# Altium PCB PCB1_DCDC_Controller.PcbDoc
Units mm, origin at the board's own origin, x right, y up, seen from the top; angles counter-clockwise.
Board outline 39.55 x 41.67 mm, 4 copper layers (Top Layer, Layer 1, Layer 2, Bottom Layer), stack 0.603 mm thick; 36 components, 15 nets, 92 pads, 187 vias.
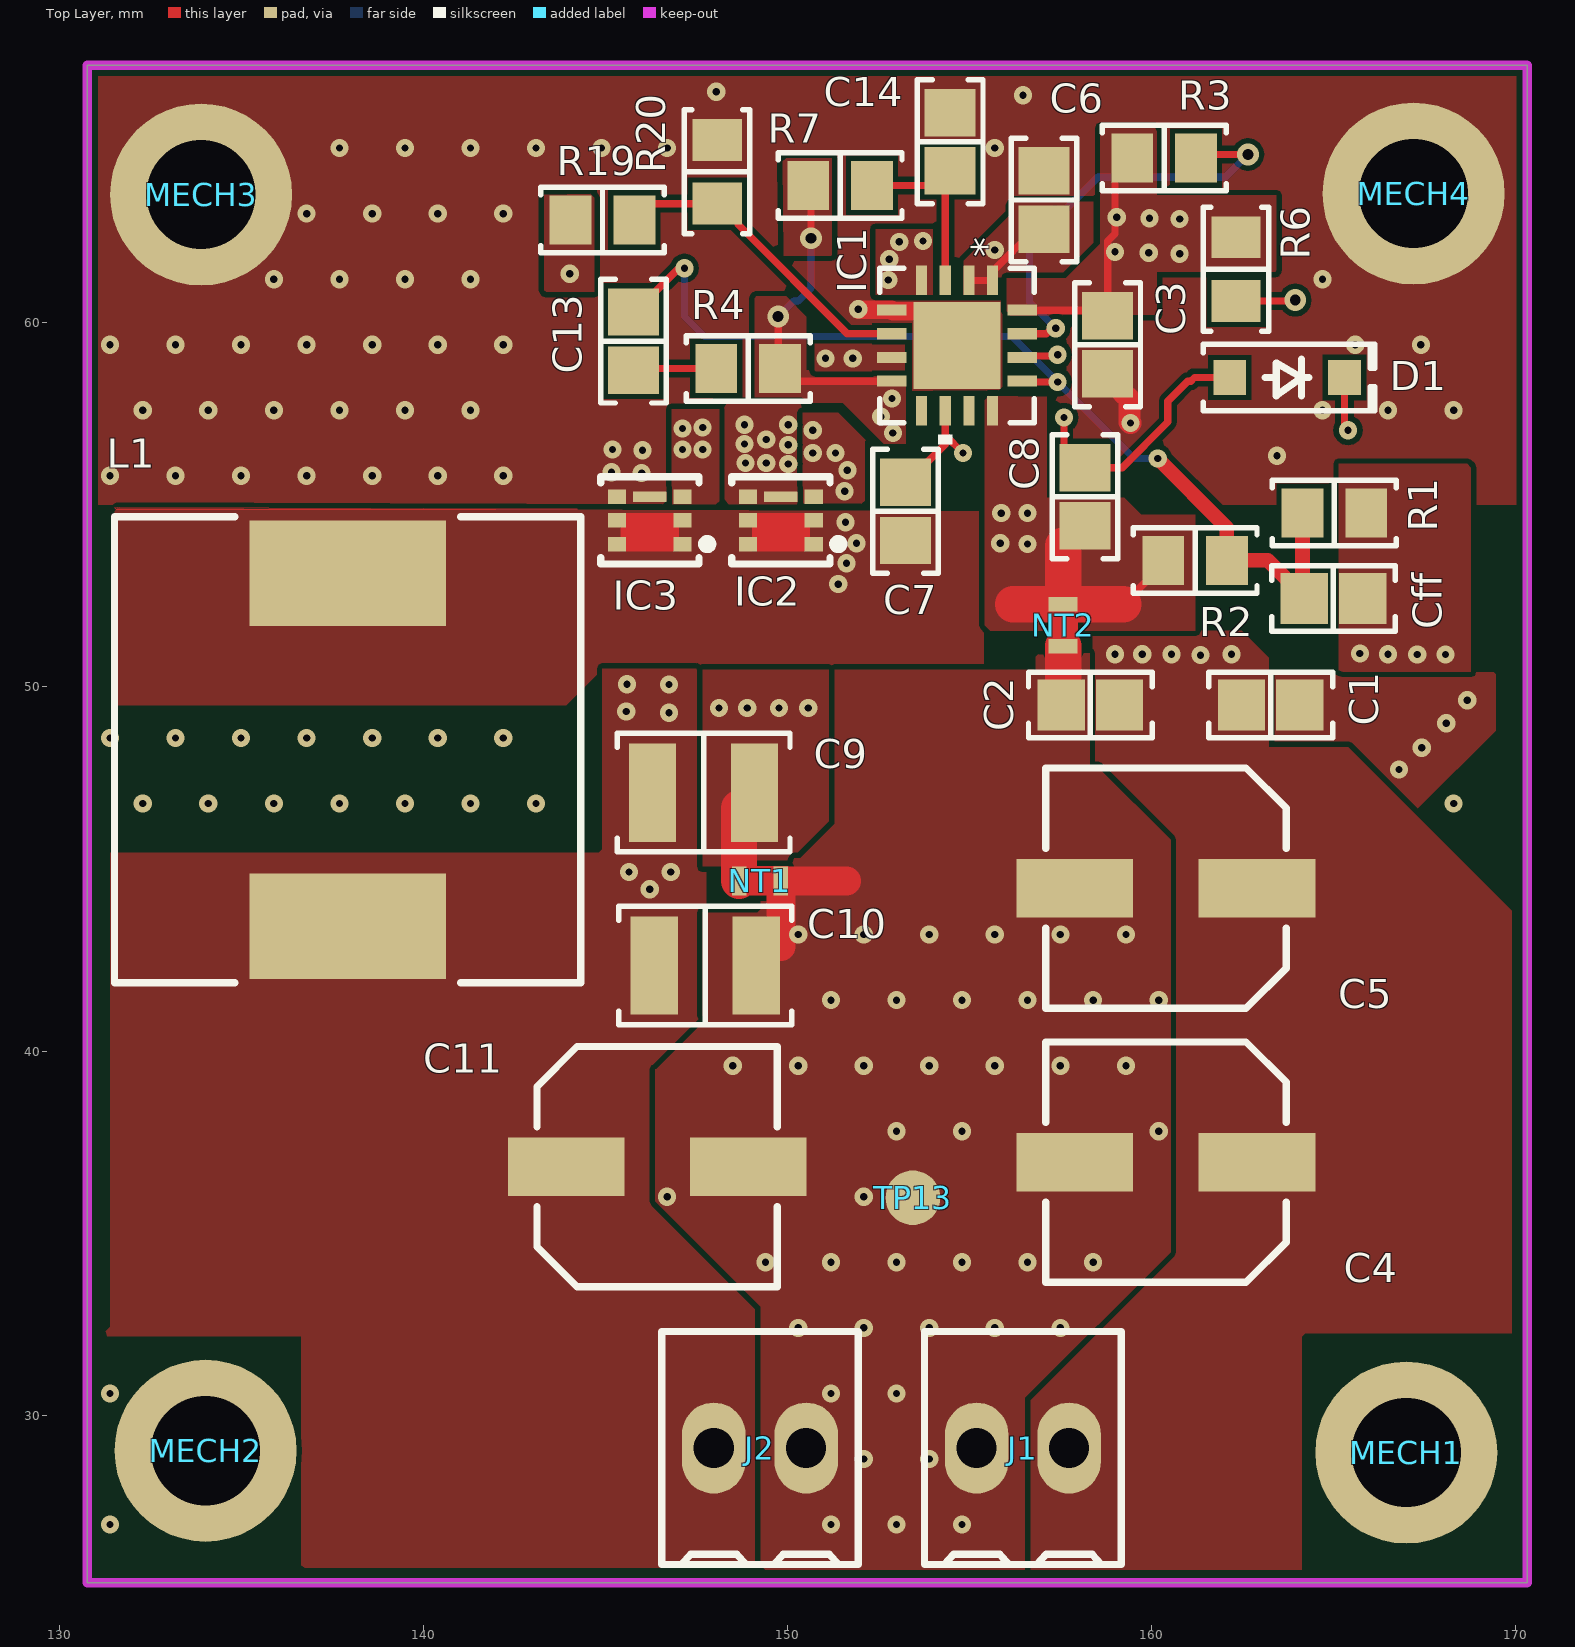
[diagram p0: Top Layer view]
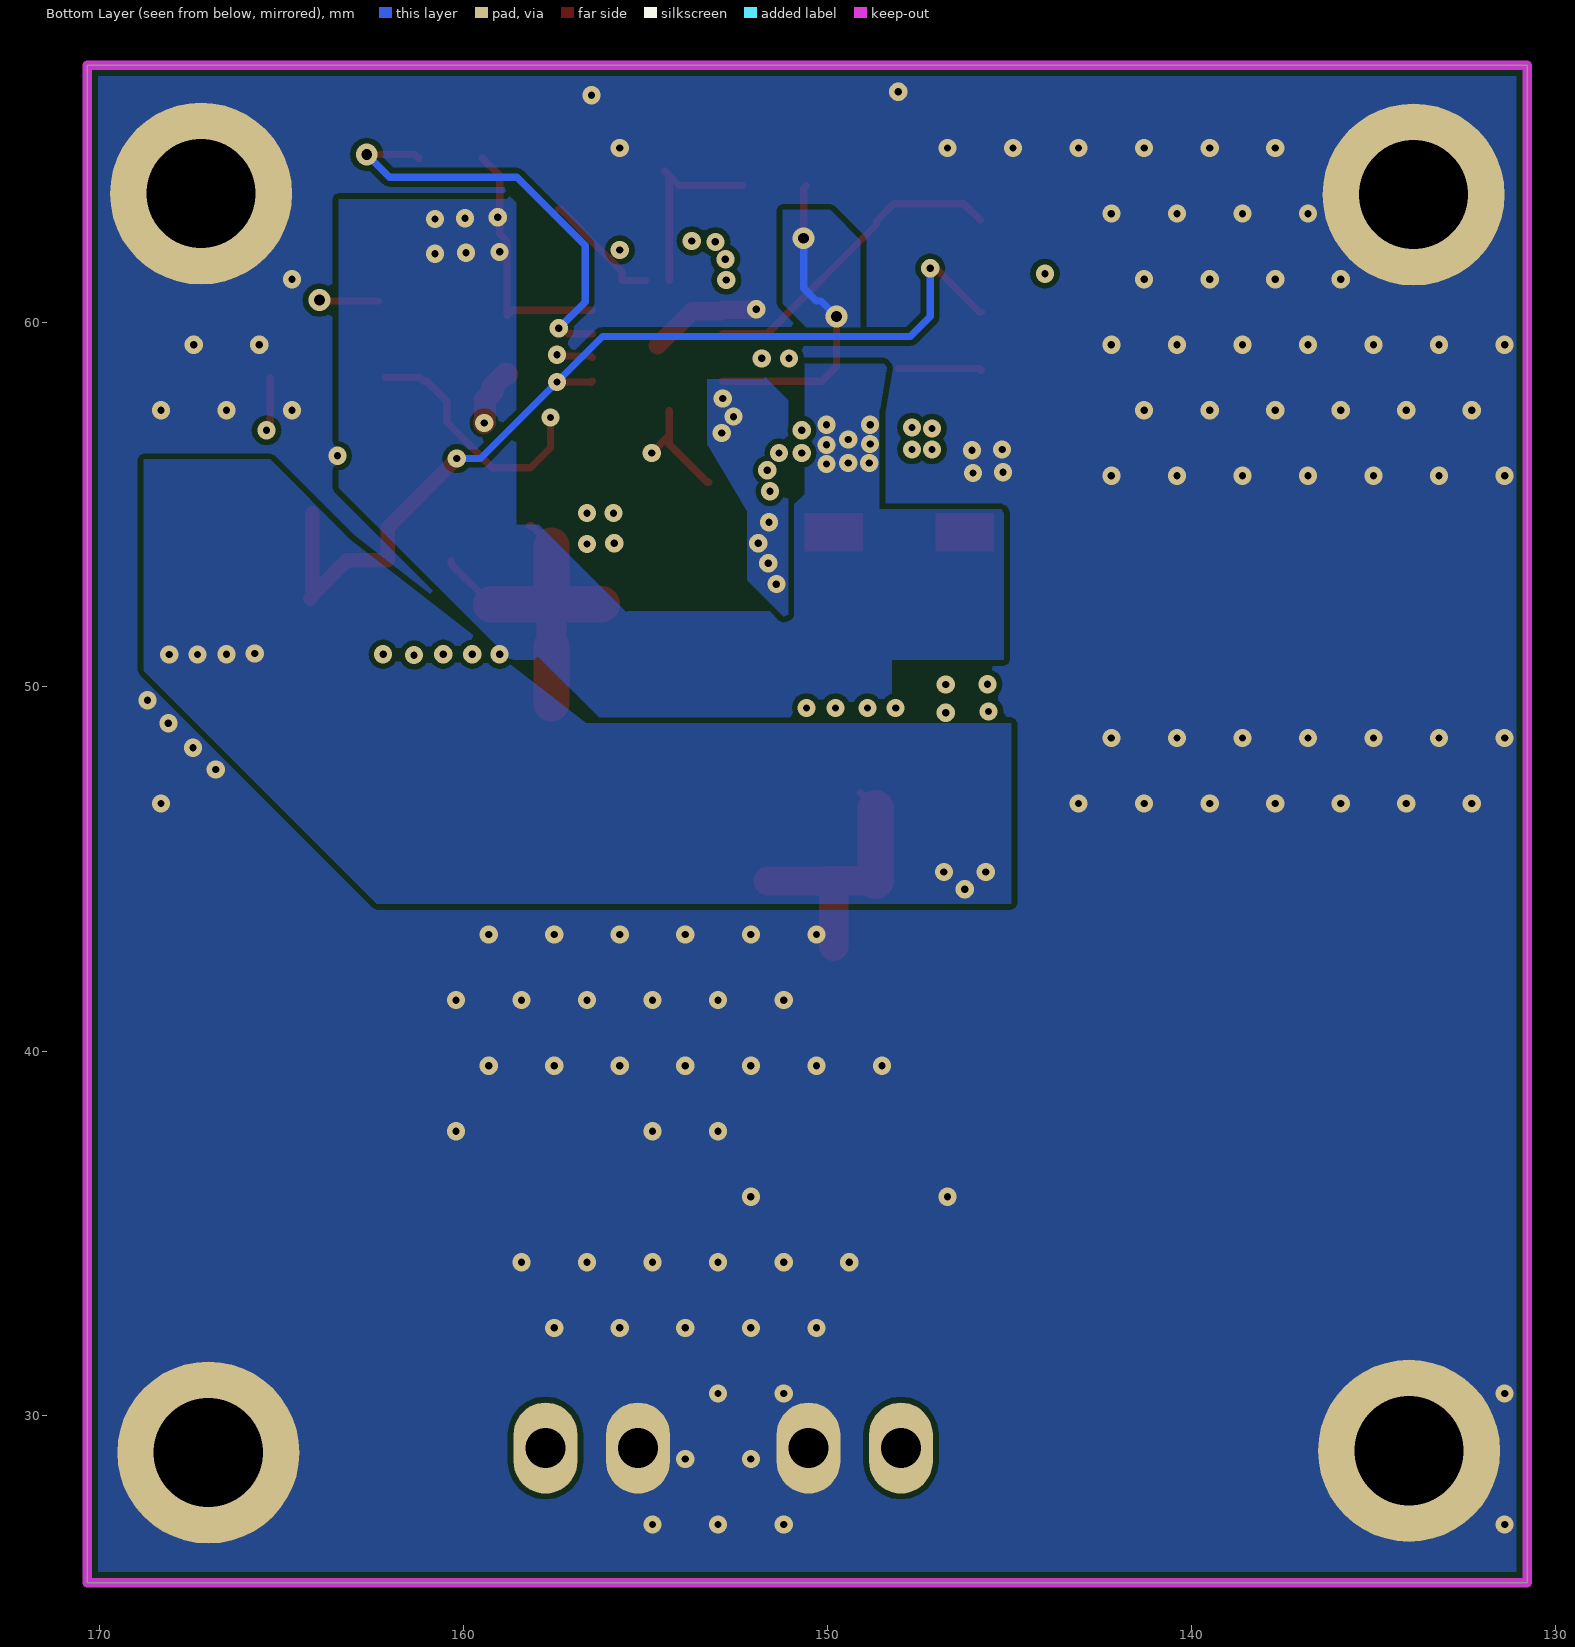
[diagram p1: Bottom Layer view, seen from below]
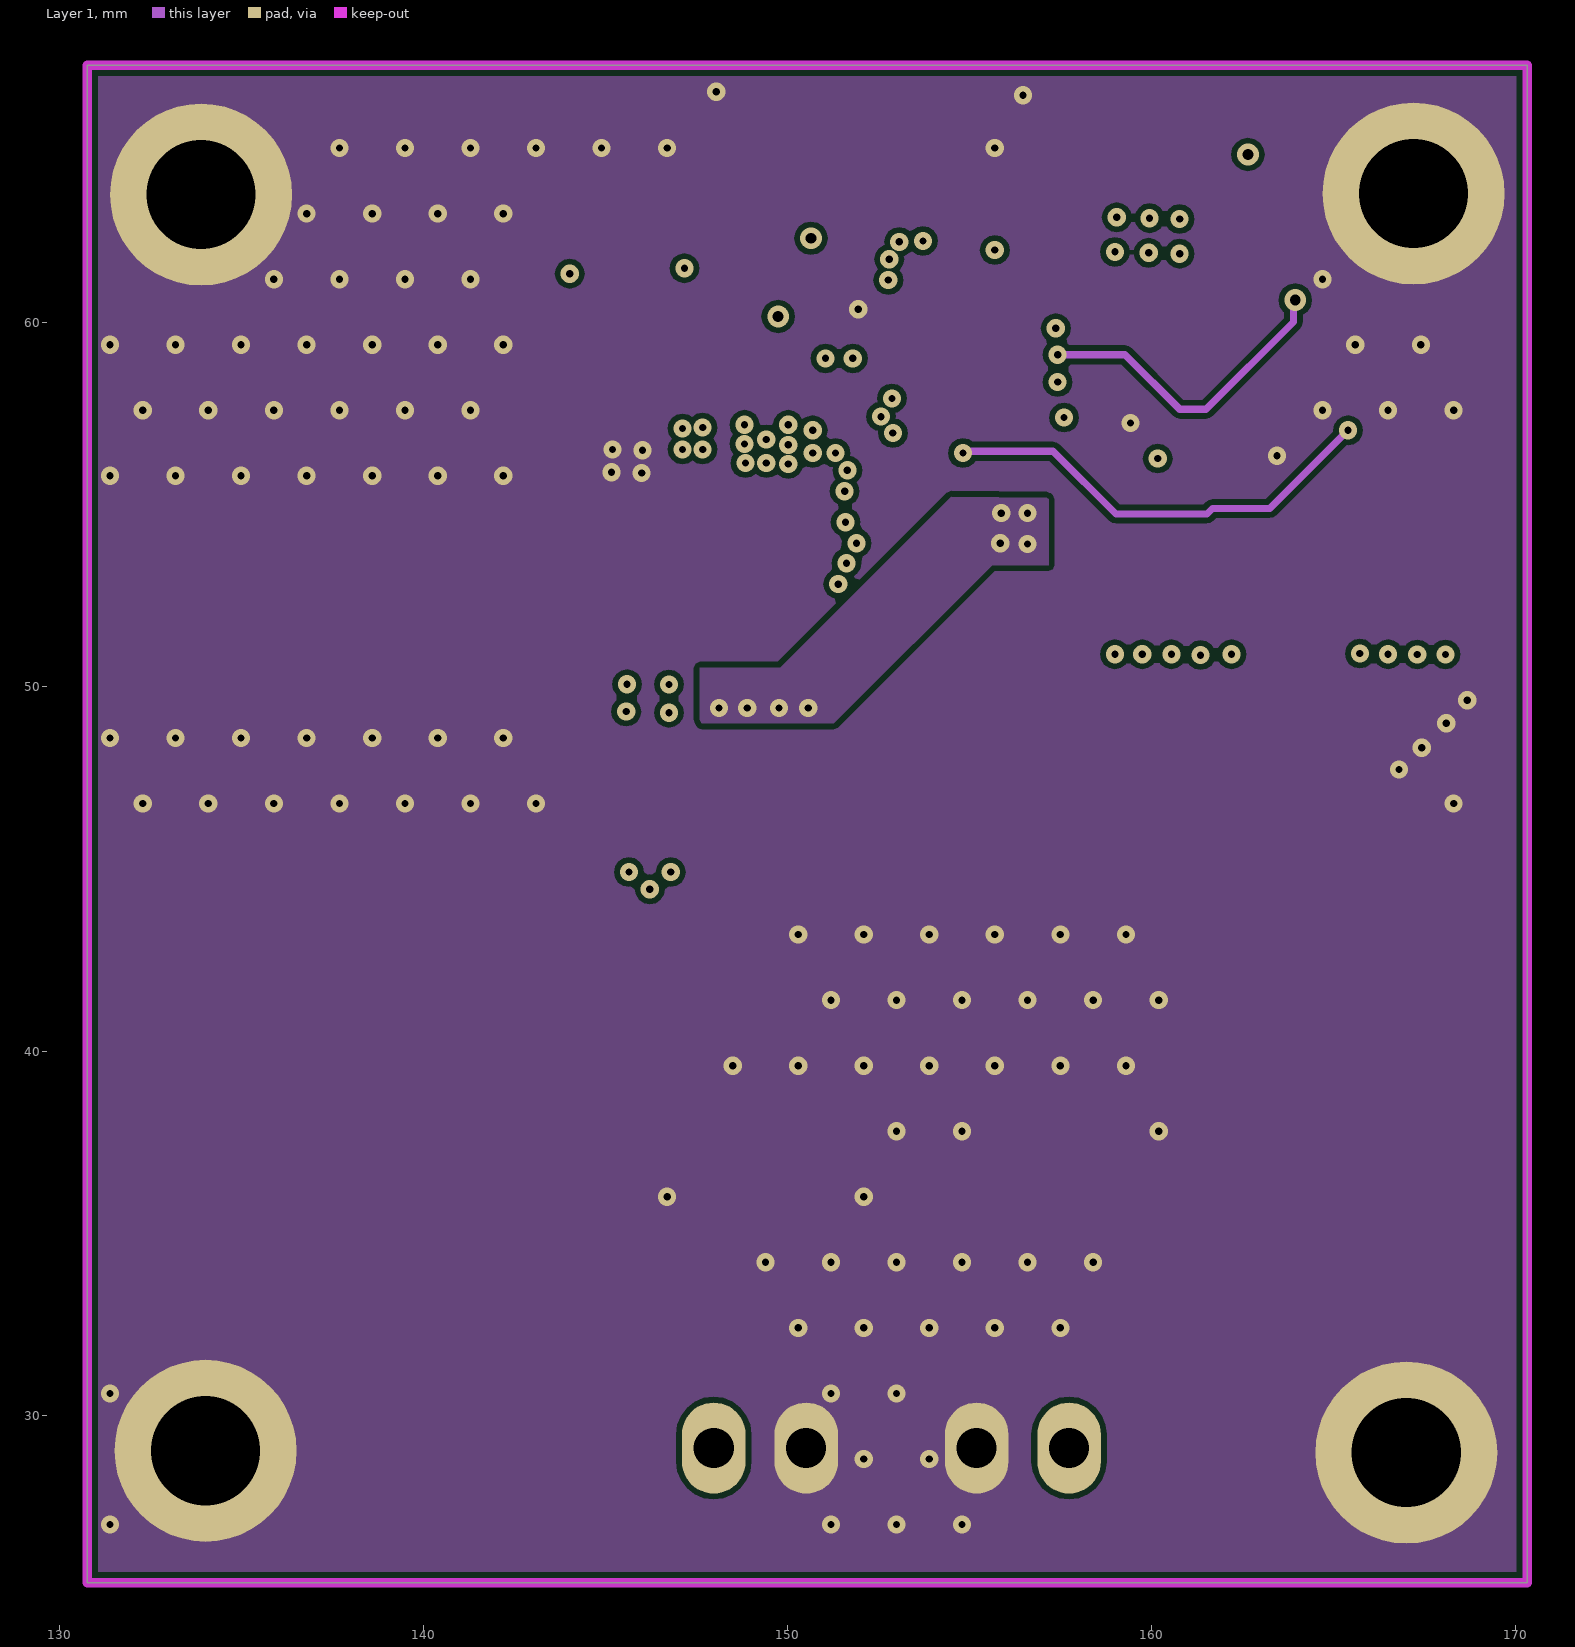
[diagram p2: Layer 1]
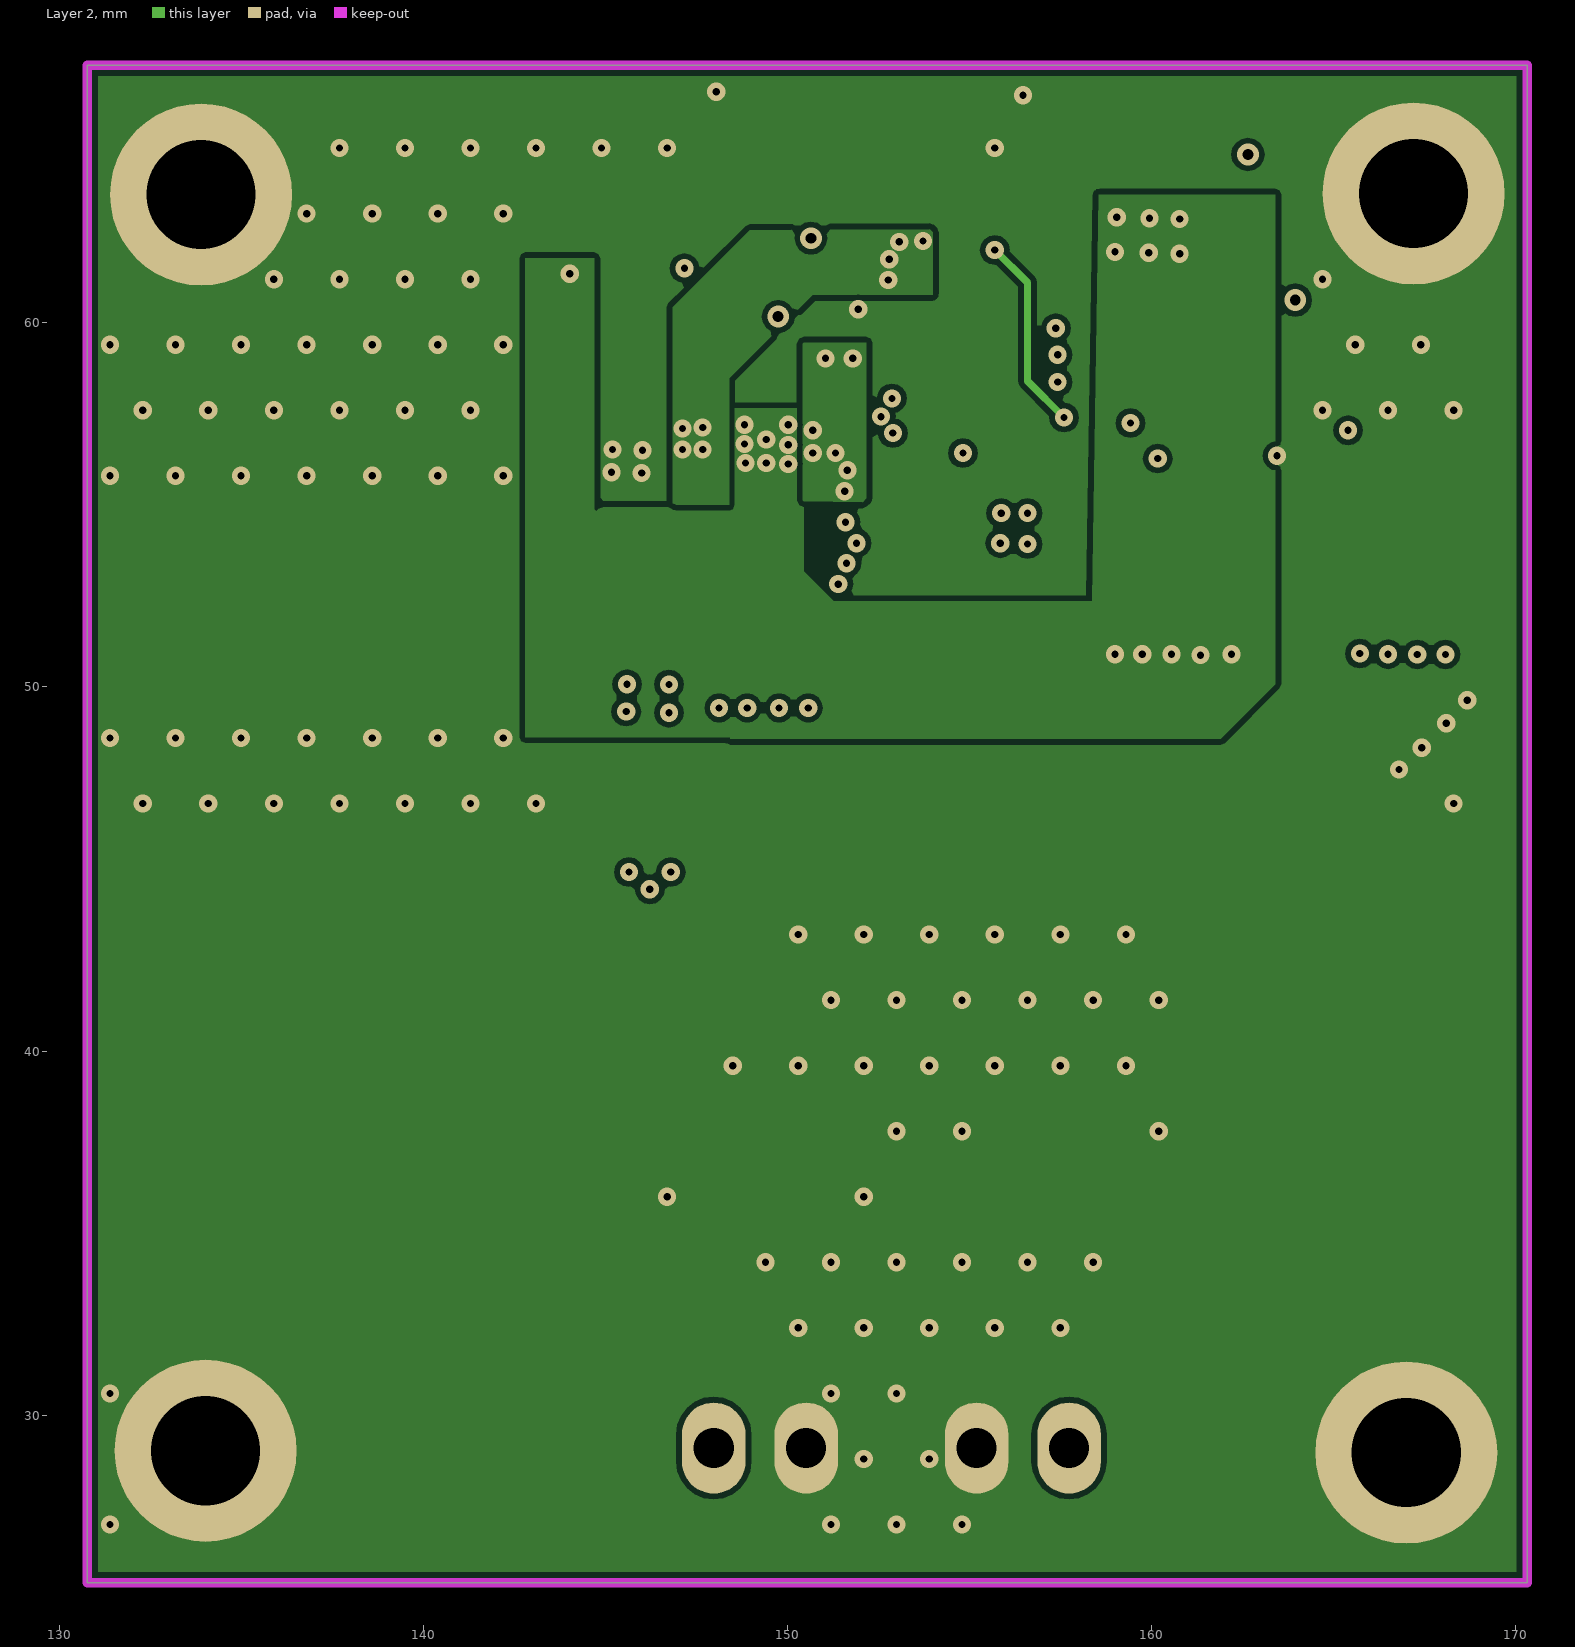
[diagram p3: Layer 2]
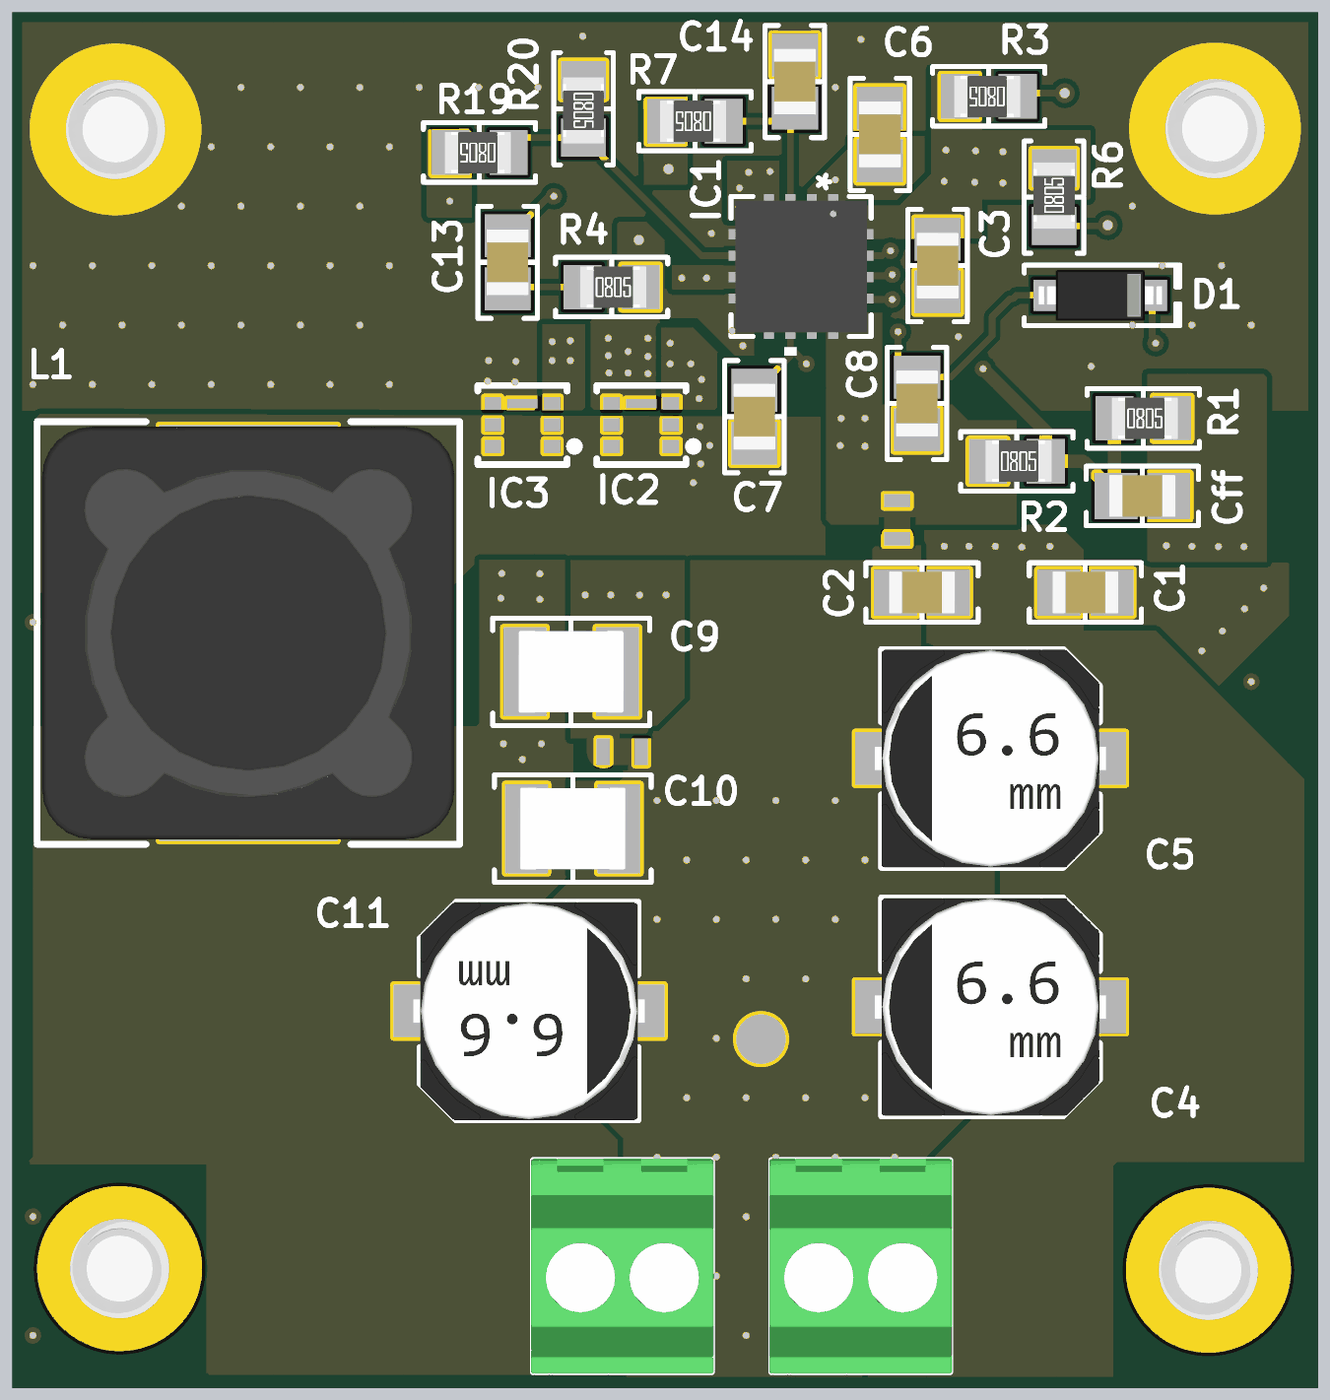
[diagram p4: 3D render of the assembled board from above, using the file's embedded part models]

## Layer stack, top to bottom
Top Solder: solder mask 0.0102, Solder Resist, Dk 3.5
Top Layer: signal copper 0.0356
Dielectric 2: prepreg 0.0711, PP-006, Dk 4.1
Layer 1: signal copper 0.035
Dielectric 1: dielectric 0.32, FR-4, Dk 4.8
Layer 2: signal copper 0.035
Dielectric 3: prepreg 0.0711, PP-006, Dk 4.1
Bottom Layer: signal copper 0.0356
Bottom Solder: solder mask 0.0102, Solder Resist, Dk 3.5

## Board outline
130.775,25.4 130.775,67.075 170.325,67.075 170.325,25.4

## Design rules (kind name [scope] priority, off if disabled: settings)
BoardOutlineClearance [All] p1: gap=0.3 ignorepadtopadclearanceinfootprint=FALSE
Clearance [All] p1: gap=0.15 ignorepadtopadclearanceinfootprint=FALSE
HoleSize [All] p1: absolutevalues=TRUE maxlimit=6.3 minlimit=0.2 maxpercent=80.000 minpercent=20.000
PlaneConnect [All] p1: planeconnectstyle=Direct reliefexpansion=0.508 reliefentries=4 reliefconductorwidth=0.254 reliefairgap=0.254
PolygonConnect [All] p1: connectstyle=Direct reliefconductorwidth=0.254 reliefentries=4 polygonreliefangle="90 Angle" airgapwidth=0.254
RoutingVias [All] p1: holewidth=0.6 width=1.2 viastyle="Through Hole" minholewidth=0.2 minwidth=0.5 maxholewidth=0.3 maxwidth=0.6
SilkToSilkClearance [All] p1: silktosilkclearance=0.16
SolderMaskExpansion "Via Tent" [IsVia] p1: expansion=0.102 istentingtop=TRUE
SolderMaskExpansion [All] p2: expansion=0.102 istentingtop=FALSE
Width [All] p1: maxlimit=1 minlimit=0.127 preferedwidth=0.2
27 further rules are at their usual default settings.

## Classes and differential pairs
component class SCH1_Main: C1 C2 C3 C4 C5 C6 C7 C8 C9 C10 C11 C13 C14 Cff D1 IC1 IC2 IC3 J1 J2 L1 MECH1 MECH2 MECH3 MECH4 NT1 NT2 R3 R4 R6 R7 R19 R20 TP13

## Components (designator, comment, footprint, x,y, rotation, side; value= is the part's Value field where it differs from the comment)
C1 "2.2µF" "CAP 0805_2012" 163.275,49.5 r180 top
C2 "2.2µF" "CAP 0805_2012" 158.325,49.5 r0 top
C3 "2.2µF" "CAP 0805_2012" 158.8,59.4 r90 top
C4 "68µF" "CAP ALSMD 6.6MM H6.1MM" 160.4,36.95 r180 top
C5 "68µF" "CAP ALSMD 6.6MM H6.1MM" 160.4,44.475 r180 top
C6 "1µF" "CAP 0805_2012" 157.05,63.375 r270 top
C7 "0.1µF" "CAP 0805_2012" 153.25,54.825 r90 top
C8 "1µF" "CAP 0805_2012" 158.175,55.225 r90 top
C9 "47µF" "CAP 1210_3225 - 2.8MM" 147.7,47.1 r180 top
C10 "47µF" "CAP 1210_3225 - 2.8MM" 147.75,42.35 r180 top
C11 "470µF" "CAP ALSMD 6.6MM H8.0MM" 146.425,36.825 r0 top
C13 "0.1µF" "CAP 0805_2012" 145.775,59.5 r270 top
C14 "10pF" "CAP 0805_2012" 154.475,64.975 r270 top
Cff "1000pF" "CAP 0805_2012" 165,52.425 r0 top
D1 "BAT46W-TP" SOD-123 163.725,58.5 r0 top
IC1 "MIC2103YML-TR" MLF-16_ML_4X4_00 154.664,59.375 r270 top
IC2 "DMN2011UFDE-7" "DIODES U-DFN2020-6E" 149.825,54.575 r180 top
IC3 "DMN2011UFDE-7" "DIODES U-DFN2020-6E" 146.225,54.575 r180 top
J1 "282834-2" "TE 282834-2" 156.47,29.1 r180 top
J2 "282834-2" "TE 282834-2" 149.25,29.1 r180 top
L1 "6.8µH" "BOURNS SRR1280" 137.925,48.275 r270 top
MECH1 "# pcs." PCB_standoff 167,28.975 r0 top
MECH2 "# pcs." PCB_standoff 134.025,29.025 r0 top
MECH3 "# pcs." PCB_standoff 133.9,63.525 r0 top
MECH4 "# pcs." PCB_standoff 167.2,63.55 r0 top
NT1 "NetTie" NetTie_Narrow2 149.25,44.675 r0 top net-tie
NT2 "NetTie" NetTie_Narrow2 157.575,51.7 r270 top net-tie
R1 "10 kOhms" "RES 0805_2012" 165.025,54.775 r0 top
R2 "1.91 kOhms" "RES 0805_2012" 161.2,53.475 r0 top
R3 "49.9 kOhms" "RES 0805_2012" 160.35,64.525 r180 top
R4 "95.3 Ohms" "RES 0805_2012" 148.925,58.75 r0 top
R6 "100 kOhms" "RES 0805_2012" 162.325,61.475 r90 top
R7 "1 kOhms" "RES 0805_2012" 151.45,63.775 r180 top
R19 "174 kOhms" "RES 0805_2012" 144.925,62.825 r180 top
R20 "100 kOhms" "RES 0805_2012" 148.075,64.15 r270 top
TP13 "Test Point" TestPoint-1.5mm 153.45,35.975 r90 top

## Footprints (in the part's own frame and the unit in brackets; to place one, negate y for a bottom-side part, rotate by r counter-clockwise, add the part's x,y. Pads: shape width x height; smd on the part's side, far side on the other; paste and mask are expansions set on the pad)
"BOURNS SRR1280" [mm] "Precision Wire Wound Inductor, 2-Leads, Body 12.50x12.50mm, IPC Medium Density"
  rect 2.9x5.4 smd: 1(-4.85,0) 2(4.85,0)
  silkscreen extent -6.4,-6.4 6.4,6.4, body extent -6.25,-6.25 6.25,6.25, height 7.9
"CAP 0805_2012" [mm] "Chip Capacitor, 2-Leads, Body 2.00x1.20mm, IPC Medium Density"
  rect 1.3x1.4 smd: 1(-0.8,0) 2(0.8,0)
  silkscreen extent -1.7,-0.9 1.7,0.9, body extent -1,-0.64 1,0.64, height 1.26
"CAP 1210_3225 - 2.8MM" [mm] "Chip Capacitor, 2-Leads, Body 3.20x2.50mm, IPC Medium Density"
  rect 1.3x2.7 smd: 1(-1.4,0) 2(1.4,0)
  silkscreen extent -2.37,-1.63 2.37,1.63, body extent -1.6,-1.25 1.6,1.25, height 2.8
"CAP ALSMD 6.6MM H6.1MM" [mm] "Aluminum Electrolytic Capacitor, Body 6.60x6.60x6.10mm, IPC Low Density"
  rect 3.2x1.6 smd: 1(-2.5,0) 2(2.5,0)
  silkscreen extent -3.3,-3.3 3.3,3.3, body extent -3.5,-3.3 3.5,3.3, height 6.1
"CAP ALSMD 6.6MM H8.0MM" [mm] "Aluminum Electrolytic Capacitor, Body 6.60x6.60x8.0mm, IPC Low Density"
  rect 3.2x1.6 smd: 1(-2.5,0) 2(2.5,0)
  silkscreen extent -3.3,-3.3 3.3,3.3, body extent -3.5,-3.3 3.5,3.3, height 8
"DIODES U-DFN2020-6E" [mm] "U-DFN2020-6(E), 6-Leads, Body 2.00x2.00mm, Pitch 0.65mm, Thermal Pad 1.05x2.3mm, IPC High Density"
  rect 0.5x0.4 smd: D(-0.9,0) D(-0.9,0.65) D(0.9,0) D(0.9,0.65) G(-0.9,-0.65) S(0.9,-0.65)
  rect 0.92x0.285 smd: S(0,-0.65)
  Top Layer region: -0.8,-0.2 0.8,-0.2 0.8,0.85 -0.8,0.85
  silkscreen extent -1.7,-1.2 1.35,1.2, body extent -1,-1 1,1, height 0.63
MLF-16_ML_4X4_00 [mm]
  rect 0.81x0.306 smd paste+0 mask+0: 1(-1.789,0.975) 2(-1.789,0.325) 3(-1.789,-0.325) 4(-1.789,-0.975) 9(1.789,-0.975) 10(1.789,-0.325) 11(1.789,0.325) 12(1.789,0.975)
  rect 0.306x0.81 smd paste+0 mask+0: 5(-0.975,-1.789) 6(-0.325,-1.789) 7(0.325,-1.789) 8(0.975,-1.789) 13(0.975,1.789) 14(0.325,1.789) 15(-0.325,1.789) 16(-0.975,1.789)
  rect 2.388x2.388 smd paste+0 mask+0: 17(0,0)
  silkscreen extent -2.12,-2.12 2.7,2.12, body extent -1.99,-1.99 1.99,1.99, height 0.89
NetTie_Narrow2 [mm]
  rect 0.4x0.8 smd: 1(-0.575,0) 2(0.575,0)
  Top Layer region: -0.775,0.4 -0.775,-0.4 0.775,-0.4 0.775,0.4
PCB_standoff [mm]
  round 5 hole 3 unplated: MH1(0,0)
  body extent -2.5,-2.89 2.5,2.89, height 5
"RES 0805_2012" [mm] "Chip Resistor, 2-Leads, Body 2.00x1.25mm, IPC Medium Density"
  rect 1.15x1.35 smd: 1(-0.875,0) 2(0.875,0)
  silkscreen extent -1.7,-0.9 1.7,0.9, body extent -0.95,-0.62 1.05,0.63, height 0.6
SOD-123 [mm] "SOD, 2-Leads, Body 1.55x3.70mm, IPC Medium Density"
  rect 0.9x0.95 smd: 1(-1.575,0) 2(1.575,0)
  silkscreen extent -2.3,-0.92 2.41,0.92, body extent -1.86,-0.78 1.86,0.77, height 1.35
"TE 282834-2" [mm]
  oval 1.75x2.5 hole 1.1: 1(-1.27,0) 2(1.27,0)
  silkscreen extent -2.7,-3.2 2.7,3.2, body extent -2.77,-3.25 2.77,3.25, height 10
TestPoint-1.5mm [mm]
  round 1.5 smd: 1(0,0)

## Part data
C1 C2 C3: library part 08053C225K4Z2A, "CAP CER 2.2UF 25V X7R 0805", Device Package="0805 (2012 Metric)", Manufacturer="AVX Corporation", Operating Temperature="-55°C ~ 125°C", Ratings=AEC-Q200, Supplier Part Number 1=478-12141-1-ND, Temperature Coefficient=X7R, Tolerance=±10%, Voltage - Rated=25V, Applications="Automotive, Boardflex Sensitive", Capacitance=2.2µF, ComponentLink1Description=Datasheet, ComponentLink1URL=http://datasheets.avx.com/AutoMLCC.pdf, ComponentLink2Description="DigiKey Link", ComponentLink2URL=http://digikey.com/product-detail/en/avx-corporation/08053C225K4Z2A/478-12141-1-ND/9374710, Features="Soft Termination", LastUpdated="1/21/2020 12:02:42 AM", Lifecycle Status=Active, Minimum Order=1, Mounting Type="Surface Mount, MLCC", Package / Case="0805 (2012 Metric)", Packaging=TapeAndReel, Part Number=08053C225K4Z2A, Part Status=Active, PartId=16604, Price=0.08, Series=FLEXITERM®, Size / Dimension="0.079\" L x 0.049\" W (2.01mm x 1.25mm)", Supplier 1=DigiKey
C4 C5: library part UWD1E680MCL1GS, "CAP ALUM 68UF 20% 25V SMD", Device Package="Radial, Can - SMD", Lifetime @ Temp.="2000 Hrs @ 105°C", Manufacturer=Nichicon, Operating Temperature="-55°C ~ 105°C", Ripple Current @ High Frequency="230mA @ 100kHz", Ripple Current @ Low Frequency="115mA @ 120Hz", Supplier Part Number 1=493-9673-1-ND, Tolerance=±20%, Voltage - Rated=25V, Applications="General Purpose", Capacitance=68µF, ComponentLink1Description=Datasheet, ComponentLink1URL=http://nichicon-us.com/english/products/pdfs/e-uwd.pdf, ComponentLink2Description="DigiKey Link", ComponentLink2URL=http://digikey.com/product-detail/en/nichicon/UWD1E680MCL1GS/493-9673-1-ND/3963005, Height - Seated (Max)="0.228\" (5.80mm)", Impedance="440 mOhms", LastUpdated="1/21/2020 2:33:32 AM", Lifecycle Status=Active, Minimum Order=1, Mounting Type="Surface Mount", Package / Case="Radial, Can - SMD", Packaging=TapeAndReel, Part Number=UWD1E680MCL1GS, Part Status=Active, PartId=8861, Price=0.22, Series=UWD, Size / Dimension="0.248\" Dia (6.30mm)", Supplier 1=DigiKey, Surface Mount Land Size="0.260\" L x 0.260\" W (6.60mm x 6.60mm)"
C6 C8: library part CC0805KKX5R8BB105, "CAP CER 1UF 25V X5R 0805", Device Package="0805 (2012 Metric)", Manufacturer=Yageo, Operating Temperature="-55°C ~ 85°C", Supplier Part Number 1=311-1868-1-ND, Temperature Coefficient=X5R, Tolerance=±10%, Voltage - Rated=25V, Applications="General Purpose", Capacitance=1µF, ComponentLink1Description=Datasheet, ComponentLink1URL=https://www.yageo.com/upload/media/product/productsearch/datasheet/mlcc/UPY-GPHC_X5R_4V-to-50V_25.pdf, ComponentLink2Description="DigiKey Link", ComponentLink2URL=http://digikey.com/product-detail/en/yageo/CC0805KKX5R8BB105/311-1868-1-ND/5195770, LastUpdated="1/21/2020 12:03:00 AM", Lifecycle Status=Active, Minimum Order=1, Mounting Type="Surface Mount, MLCC", Package / Case="0805 (2012 Metric)", Packaging=TapeAndReel, Part Number=CC0805KKX5R8BB105, Part Status=Active, PartId=6721, Price=0.04, Series=CC, Size / Dimension="0.079\" L x 0.049\" W (2.00mm x 1.25mm)", Supplier 1=DigiKey, Thickness (Max)="0.057\" (1.45mm)"
C7 C13: library part CL21B104KBFNNNE, "CAP CER 0.1UF 50V X7R 0805", Device Package="0805 (2012 Metric)", Manufacturer="Samsung Electro-Mechanics", Operating Temperature="-55°C ~ 125°C", Supplier Part Number 1=1276-1180-1-ND, Temperature Coefficient=X7R, Tolerance=±10%, Voltage - Rated=50V, Applications="General Purpose", Capacitance=0.1µF, ComponentLink1Description=Datasheet, ComponentLink1URL=http://www.samsungsem.com/kr/support/product-search/mlcc/CL21B104KBFNNNE.jsp, ComponentLink2Description="DigiKey Link", ComponentLink2URL=http://digikey.com/product-detail/en/samsung-electro-mechanics/CL21B104KBFNNNE/1276-1180-1-ND/3889266, LastUpdated="1/21/2020 12:03:00 AM", Lifecycle Status=Active, Minimum Order=1, Mounting Type="Surface Mount, MLCC", Package / Case="0805 (2012 Metric)", Packaging=TapeAndReel, Part Number=CL21B104KBFNNNE, Part Status=Active, PartId=6348, Price=0.01, Series=CL, Size / Dimension="0.079\" L x 0.049\" W (2.00mm x 1.25mm)", Supplier 1=DigiKey, Thickness (Max)="0.053\" (1.35mm)"
C9 C10: library part CL32A476KOJNNNE, "CAP CER 47UF 16V X5R 1210", Device Package="1210 (3225 Metric)", Manufacturer="Samsung Electro-Mechanics", Operating Temperature="-55°C ~ 85°C", Supplier Part Number 1=1276-3376-1-ND, Temperature Coefficient=X5R, Tolerance=±10%, Voltage - Rated=16V, Applications="General Purpose", Capacitance=47µF, ComponentLink1Description=Datasheet, ComponentLink1URL=http://www.samsungsem.com/kr/support/product-search/mlcc/CL32A476KOJNNNE.jsp, ComponentLink2Description="DigiKey Link", ComponentLink2URL=http://digikey.com/product-detail/en/samsung-electro-mechanics/CL32A476KOJNNNE/1276-3376-1-ND/3891462, LastUpdated="1/21/2020 12:30:39 AM", Lifecycle Status=Active, Minimum Order=1, Mounting Type="Surface Mount, MLCC", Package / Case="1210 (3225 Metric)", Packaging=TapeAndReel, Part Number=CL32A476KOJNNNE, Part Status=Active, PartId=23769, Price=0.43, Series=CL, Size / Dimension="0.126\" L x 0.098\" W (3.20mm x 2.50mm)", Supplier 1=DigiKey, Thickness (Max)="0.106\" (2.70mm)"
C11: library part EMZR100ARA471MF80G, "CAP ALUM 470UF 20% 10V SMD", Device Package="Radial, Can - SMD", ESR (Equivalent Series Resistance)="160 mohm @ 100kHz", Lifetime @ Temp.="2000 Hrs @ 105°C", Manufacturer="United Chemi-Con", Operating Temperature="-55°C ~ 105°C", Ratings=AEC-Q200, Ripple Current @ High Frequency="600mA @ 100kHz", Ripple Current @ Low Frequency="300mA @ 120Hz", Supplier Part Number 1=565-5133-1-ND, Tolerance=±20%, Voltage - Rated=10V, Applications=Automotive, Capacitance=470µF, ComponentLink1Description=Datasheet, ComponentLink1URL=http://www.chemi-con.co.jp/cgi-bin/CAT_DB/SEARCH/cat_db_al.cgi?e=e&j=p&pdfname=mzr, ComponentLink2Description="DigiKey Link", ComponentLink2URL=http://digikey.com/product-detail/en/united-chemi-con/EMZR100ARA471MF80G/565-5133-1-ND/8637128, Height - Seated (Max)="0.315\" (8.00mm)", LastUpdated="1/21/2020 4:06:45 AM", Lifecycle Status=Active, Minimum Order=1, Mounting Type="Surface Mount", Package / Case="Radial, Can - SMD", Packaging=TapeAndReel, Part Number=EMZR100ARA471MF80G, Part Status=Active, PartId=8433, Polarization=Polar, Price=0.20, Series="Alchip™- MZR", Size / Dimension="0.248\" Dia (6.30mm)", Supplier 1=DigiKey, Surface Mount Land Size="0.260\" L x 0.260\" W (6.60mm x 6.60mm)"
C14: library part C0805C100J5GACTU, "CAP CER 10PF 50V C0G/NP0 0805", Device Package="0805 (2012 Metric)", Manufacturer=KEMET, Operating Temperature="-55°C ~ 125°C", Supplier Part Number 1=399-1108-1-ND, Temperature Coefficient="C0G, NP0", Tolerance=±5%, Voltage - Rated=50V, Applications="General Purpose", Capacitance=10pF, ComponentLink1Description=Datasheet, ComponentLink1URL=https://api.kemet.com/component-edge/download/datasheet/C0805C100J5GACTU.pdf, ComponentLink2Description="DigiKey Link", ComponentLink2URL=http://digikey.com/product-detail/en/kemet/C0805C100J5GACTU/399-1108-1-ND/411383, Features="Low ESL", LastUpdated="1/21/2020 12:02:51 AM", Lifecycle Status=Active, Minimum Order=1, Mounting Type="Surface Mount, MLCC", Package / Case="0805 (2012 Metric)", Packaging=TapeAndReel, Part Number=C0805C100J5GACTU, Part Status=Active, PartId=12731, Price=0.02, Series="SMD Comm C0G", Size / Dimension="0.079\" L x 0.049\" W (2.00mm x 1.25mm)", Supplier 1=DigiKey, Thickness (Max)="0.035\" (0.88mm)"
Cff: library part CC0805GRNPO9BN102, "CAP CER 1000PF 50V NPO 0805", Device Package="0805 (2012 Metric)", Manufacturer=Yageo, Operating Temperature="-55°C ~ 125°C", Supplier Part Number 1=311-4189-1-ND, Temperature Coefficient="C0G, NP0", Tolerance=±2%, Voltage - Rated=50V, Applications="General Purpose", Capacitance=1000pF, ComponentLink1Description=Datasheet, ComponentLink1URL=https://www.yageo.com/upload/media/product/productsearch/datasheet/mlcc/UPY-GP_NP0_16V-to-50V_17.pdf, ComponentLink2Description="DigiKey Link", ComponentLink2URL=http://digikey.com/product-detail/en/yageo/CC0805GRNPO9BN102/311-4189-1-ND/8025278, LastUpdated="1/21/2020 12:02:57 AM", Lifecycle Status=Active, Minimum Order=1, Mounting Type="Surface Mount, MLCC", Package / Case="0805 (2012 Metric)", Packaging=TapeAndReel, Part Number=CC0805GRNPO9BN102, Part Status=Active, PartId=8594, Price=0.03, Series=CC, Size / Dimension="0.079\" L x 0.049\" W (2.00mm x 1.25mm)", Supplier 1=DigiKey, Thickness (Max)="0.028\" (0.70mm)"
D1: "DIODE SCHOTTKY 100V 75MA SOD123", Capacitance @ Vr, F="10pF @ 0V, 1MHz", Current - Average Rectified (Io)=75mA, Current - Reverse Leakage @ Vr="5µA @ 75V", Device Package=SOD-123, Manufacturer="Micro Commercial Co", Operating Temperature - Junction="-55°C ~ 125°C", Supplier Part Number 1=BAT46W-TPMSCT-ND, Voltage - DC Reverse (Vr) (Max)=100V, Voltage - Forward (Vf) (Max) @ If="450mV @ 10mA", ComponentLink1Description=Datasheet, ComponentLink1URL=https://www.mccsemi.com/pdf/Products/BAT46W(SOD-123).pdf, ComponentLink2Description="DigiKey Link", ComponentLink2URL=http://digikey.com/product-detail/en/micro-commercial-co/BAT46W-TP/BAT46W-TPMSCT-ND/2345686, Diode Type=Schottky, LastUpdated="1/21/2020 2:42:33 AM", Lifecycle Status=Active, Minimum Order=1, Mounting Type="Surface Mount", Package / Case=SOD-123, Packaging=TapeAndReel, Part Number=BAT46W-TP, Part Status=Active, PartId=2322, Price=0.05, Series=-, Speed="Small Signal =< 200mA (Io), Any Speed", Supplier 1=DigiKey, Supplier Device Package=SOD-123
IC1: "IC REG CTRLR BUCK 16MLF", Manufacturer=Microchip, Supplier Part Number 1=576-4156-1-ND, Built_By=EMA_Jessica, Category="Voltage Regulators - Switching", ComponentLink1Description=http://components.arrow.com/part/dataview/56727868S414286N1374?src-supplier=Arrow, ComponentLink1URL=http://components.arrow.com/part/dataview/56727868S414286N1374?src-supplier=Arrow, ComponentLink2Description=http://components.arrow.com/part/dataview/0323_06358916?src-supplier=Arrow+Europe, ComponentLink2URL=http://components.arrow.com/part/dataview/0323_06358916?src-supplier=Arrow+Europe, ComponentLink3Description=http://www.microchip.com/mymicrochip/filehandler.aspx?ddocname=en579526&src-supplier=Digi-Key, ComponentLink3URL=http://www.microchip.com/mymicrochip/filehandler.aspx?ddocname=en579526&src-supplier=Digi-Key, ComponentLink4Description=http://www.micrel.com/_PDF/MIC2103_4.pdf?src-supplier=Mouser, ComponentLink4URL=http://www.micrel.com/_PDF/MIC2103_4.pdf?src-supplier=Mouser, Copyright="Copyright (C) 2018 Accelerated Designs. All rights reserved", Manufacturer Part Number=MIC2103YML-TR, Manufacturer_Part_Number=MIC2103YML-TR, Pricing 1="1=1.38000, 25=1.15000, 100=1.05000 (USD)", RefDes=RefDes, RoHS=Yes, SourceLibrary=Microchip_2019-08-23_2, Stock 1=4575, Supplier 1=Digi-Key, Type=DEV, Vendor=Microchip
IC2 IC3: "MOSFET N-CH 20V 11.7A UDFN2020-6", Current - Continuous Drain (Id) @ 25°C="11.7A (Ta)", Device Package="6-UDFN Exposed Pad", Drain to Source Voltage (Vdss)=20V, Drive Voltage (Max Rds On,  Min Rds On)="1.5V, 4.5V", Input Capacitance (Ciss) (Max) @ Vds="2248pF @ 10V", Manufacturer="Diodes Incorporated", Operating Temperature="-55°C ~ 150°C (TJ)", Power Dissipation (Max)="610mW (Ta)", Supplier Device Package="U-DFN2020-6 (Type E)", Supplier Part Number 1=DMN2011UFDE-7DICT-ND, ComponentLink1Description=Datasheet, ComponentLink1URL=https://www.diodes.com/assets/Datasheets/DMN2011UFDE.pdf, ComponentLink2Description="DigiKey Link", ComponentLink2URL=http://digikey.com/product-detail/en/diodes-incorporated/DMN2011UFDE-7/DMN2011UFDE-7DICT-ND/4810946, FET Type=N-Channel, Gate Charge (Qg) (Max) @ Vgs="56nC @ 10V", LastUpdated="3/30/2020 1:01:59 PM", Lifecycle Status=Active, Minimum Order=1, Mounting Type="Surface Mount", Package / Case="6-UDFN Exposed Pad", Packaging=TapeAndReel, Part Number=DMN2011UFDE-7, Part Status=Active, Price=0.24, Rds On (Max) @ Id, Vgs="9.5mOhm @ 7A, 4.5V", Series=-, Supplier 1=DigiKey, Technology="MOSFET (Metal Oxide)", Vgs (Max)=±12V, Vgs(th) (Max) @ Id="1V @ 250µA"
J1 J2: "TERM BLK 2P SIDE ENT 2.54MM PCB", Color=Green, Current=10A, Manufacturer="TE Connectivity AMP Connectors", Supplier Part Number 1=A98333-ND, Voltage=150V, ComponentLink1Description=Datasheet, ComponentLink1URL=https://www.te.com/commerce/DocumentDelivery/DDEController?Action=srchrtrv&DocNm=282834&DocType=Customer+Drawing&DocLang=English, ComponentLink2Description="DigiKey Link", ComponentLink2URL=http://digikey.com/product-detail/en/te-connectivity-amp-connectors/282834-2/A98333-ND/1150135, LastUpdated="1/15/2020 4:15:38 AM", Lifecycle Status=Active, Mating Orientation="Horizontal with Board", Minimum Order=1, Mounting Type="Through Hole", Number of Levels=1, Packaging=Bulk, Part Number=282834-2, Part Status=Active, Pitch="0.100\" (2.54mm)", Positions Per Level=2, Price=0.88, Series=Buchanan, Supplier 1=DigiKey, Wire Gauge="16-30 AWG", Wire Termination="Screw - Rising Cage Clamp"
L1: library part SRR1280-6R8Y, "FIXED IND 6.8UH 7.6A 18.5MOHM SM", Current - Saturation=8A, Current Rating (Amps)=7.6A, DC Resistance (DCR)="18.5mOhm Max", Device Package=Nonstandard, Frequency - Self Resonant=22MHz, Inductance Frequency - Test=100kHz, Manufacturer="Bourns Inc.", Operating Temperature="-40°C ~ 125°C", Q @ Freq="20 @ 7.96MHz", Supplier Part Number 1=SRR1280-6R8YCT-ND, Tolerance=±30%, ComponentLink1Description=Datasheet, ComponentLink1URL=https://www.bourns.com/docs/Product-Datasheets/SRR1280.pdf, ComponentLink2Description="DigiKey Link", ComponentLink2URL=http://digikey.com/product-detail/en/bourns-inc/SRR1280-6R8Y/SRR1280-6R8YCT-ND/3986771, Height - Seated (Max)="0.315\" (8.00mm)", Inductance=6.8µH, LastUpdated="1/21/2020 3:25:29 AM", Lifecycle Status=Active, Material - Core=Ferrite, Minimum Order=1, Mounting Type="Surface Mount", Package / Case=Nonstandard, Packaging=TapeAndReel, Part Number=SRR1280-6R8Y, Part Status=Active, PartId=41, Price=0.65, Series=SRR1280, Shielding=Shielded, Size / Dimension="0.492\" L x 0.492\" W (12.50mm x 12.50mm)", Supplier 1=DigiKey, Type=Wirewound
MECH1 MECH2 MECH3 MECH4: library part "STANDOFF_M-F_THREADED_M3x8x10mm_HEX_5mm dia", "STANDOFF M/F MET 5MM HEX 10MM L", Color=Natural, Manufacturer 1="Keystone Electronics", Manufacturer Part Number 1=24313, Supplier Part Number 1=24313K-ND, Between Board Height="0.394\" (10.0mm)", Category="Hardware Fasteners Accessories", ComponentLink1Description=http://www.keyelco.com/pdfs/M55p67.pdf, ComponentLink1URL=http://www.keyelco.com/pdfs/M55p67.pdf, Description 1="STANDOFF M/F MET 5MM HEX 10MM L", Length - Overall="0.709\" (18.0mm)", Material=Brass, Plating=Nickel, Pricing 1="10=0.969, 100=0.881, 500=0.58, 1000=0.3685, 2500=0.34215 (USD)", RoHS="RoHS Compliant", SCDType=undef, Size="0.197\" (5.0mm) Hex", Stock 1=240, Supplier 1=Digi-Key, Thread/Screw/Hole Size="M3 Thread", Type="Hex Threaded, Male/Female"
R1: library part CRS0805-FX-1002ELF, "RES SMD 10K OHM 1% 1/4W 0805", Device Package="0805 (2012 Metric)", Manufacturer="Bourns Inc.", Operating Temperature="-55°C ~ 155°C", Power (Watts)="0.25W, 1/4W", Supplier Device Package=0805, Supplier Part Number 1=CRS0805-FX-1002ELFCT-ND, Temperature Coefficient=±100ppm/°C, Tolerance=±1%, ComponentLink1Description=Datasheet, ComponentLink1URL=https://www.bourns.com/data/global/pdfs/CRS.pdf, ComponentLink2Description="DigiKey Link", ComponentLink2URL=http://digikey.com/product-detail/en/bourns-inc/CRS0805-FX-1002ELF/CRS0805-FX-1002ELFCT-ND/5778744, Composition="Thick Film", Features="High Voltage, Pulse Withstanding", Height - Seated (Max)="0.024\" (0.60mm)", LastUpdated="1/21/2020 1:39:12 AM", Lifecycle Status=Active, Minimum Order=1, Number of Terminations=2, Package / Case="0805 (2012 Metric)", Packaging=TapeAndReel, Part Number=CRS0805-FX-1002ELF, Part Status=Active, PartId=49386, Price=0.04, Resistance="10 kOhms", Series=CRS, Size / Dimension="0.079\" L x 0.049\" W (2.00mm x 1.25mm)", Supplier 1=DigiKey
R2: library part RT0805BRD071K91L, "RES SMD 1.91K OHM 0.1% 1/8W 0805", Device Package="0805 (2012 Metric)", Manufacturer=Yageo, Operating Temperature="-55°C ~ 155°C", Power (Watts)="0.125W, 1/8W", Supplier Device Package=0805, Supplier Part Number 1=YAG4852CT-ND, Temperature Coefficient=±25ppm/°C, Tolerance=±0.1%, ComponentLink1Description=Datasheet, ComponentLink1URL=https://www.yageo.com/upload/media/product/productsearch/datasheet/rchip/PYu-RT_1-to-0.01_RoHS_L_11.pdf, ComponentLink2Description="DigiKey Link", ComponentLink2URL=http://digikey.com/product-detail/en/yageo/RT0805BRD071K91L/YAG4852CT-ND/6617008, Composition="Thin Film", Height - Seated (Max)="0.024\" (0.60mm)", LastUpdated="1/21/2020 1:44:20 AM", Lifecycle Status=Active, Minimum Order=1, Number of Terminations=2, Package / Case="0805 (2012 Metric)", Packaging=TapeAndReel, Part Number=RT0805BRD071K91L, Part Status=Active, PartId=40717, Price=0.05, Resistance="1.91 kOhms", Series=RT, Size / Dimension="0.079\" L x 0.049\" W (2.00mm x 1.25mm)", Supplier 1=DigiKey
R3: library part CRCW080549K9FKEAC, "RES SMD 49.9K OHM 1% 1/8W 0805", Device Package="0805 (2012 Metric)", Manufacturer="Vishay Dale", Operating Temperature="-55°C ~ 155°C", Power (Watts)="0.125W, 1/8W", Supplier Device Package=0805, Supplier Part Number 1=541-4141-1-ND, Temperature Coefficient=±100ppm/°C, Tolerance=±1%, ComponentLink1Description=Datasheet, ComponentLink1URL=http://www.vishay.com/docs/28773/crcwce3.pdf, ComponentLink2Description="DigiKey Link", ComponentLink2URL=http://digikey.com/product-detail/en/vishay-dale/CRCW080549K9FKEAC/541-4141-1-ND/7928824, Composition="Thick Film", Height - Seated (Max)="0.024\" (0.60mm)", LastUpdated="1/21/2020 1:41:53 AM", Lifecycle Status=Active, Minimum Order=1, Number of Terminations=2, Package / Case="0805 (2012 Metric)", Packaging=TapeAndReel, Part Number=CRCW080549K9FKEAC, Part Status=Active, PartId=46246, Price=0.01, Resistance="49.9 kOhms", Series=CRCW-C, Size / Dimension="0.079\" L x 0.049\" W (2.00mm x 1.25mm)", Supplier 1=DigiKey
R4: library part ERA-6AEB95R3V, "RES 95.3 OHM 0.1% 1/8W 0805", Device Package="0805 (2012 Metric)", Manufacturer="Panasonic Electronic Components", Operating Temperature="-55°C ~ 155°C", Power (Watts)="0.125W, 1/8W", Ratings=AEC-Q200, Supplier Device Package=0805, Supplier Part Number 1=P95.3DACT-ND, Temperature Coefficient=±25ppm/°C, Tolerance=±0.1%, ComponentLink1Description=Datasheet, ComponentLink1URL=https://industrial.panasonic.com/cdbs/www-data/pdf/RDM0000/AOA0000C307.pdf, ComponentLink2Description="DigiKey Link", ComponentLink2URL=http://digikey.com/product-detail/en/panasonic-electronic-components/ERA-6AEB95R3V/P95.3DACT-ND/3075294, Composition="Thin Film", Features="Automotive AEC-Q200", Height - Seated (Max)="0.024\" (0.60mm)", LastUpdated="1/21/2020 1:48:33 AM", Lifecycle Status=Active, Minimum Order=1, Number of Terminations=2, Package / Case="0805 (2012 Metric)", Packaging=TapeAndReel, Part Number=ERA-6AEB95R3V, Part Status=Active, PartId=31156, Price=0.04, Resistance="95.3 Ohms", Series=ERA-6A, Size / Dimension="0.079\" L x 0.049\" W (2.00mm x 1.25mm)", Supplier 1=DigiKey
R6 R20: library part ERJ-6GEYJ104V, "RES SMD 100K OHM 5% 1/8W 0805", Device Package="0805 (2012 Metric)", Manufacturer="Panasonic Electronic Components", Operating Temperature="-55°C ~ 155°C", Power (Watts)="0.125W, 1/8W", Ratings=AEC-Q200, Supplier Device Package=0805, Supplier Part Number 1=P100KACT-ND, Temperature Coefficient=±200ppm/°C, Tolerance=±5%, ComponentLink1Description=Datasheet, ComponentLink1URL=http://industrial.panasonic.com/www-cgi/jvcr13pz.cgi?E+PZ+3+AOA0001+ERJ6GEYJ104V+7+WW, ComponentLink2Description="DigiKey Link", ComponentLink2URL=http://digikey.com/product-detail/en/panasonic-electronic-components/ERJ-6GEYJ104V/P100KACT-ND/692, Composition="Thick Film", Features="Automotive AEC-Q200", Height - Seated (Max)="0.028\" (0.70mm)", LastUpdated="1/21/2020 1:39:37 AM", Lifecycle Status=Active, Minimum Order=1, Number of Terminations=2, Package / Case="0805 (2012 Metric)", Packaging=TapeAndReel, Part Number=ERJ-6GEYJ104V, Part Status=Active, PartId=48780, Price=0.01, Resistance="100 kOhms", Series=ERJ, Size / Dimension="0.079\" L x 0.049\" W (2.00mm x 1.25mm)", Supplier 1=DigiKey
R7: library part RT0805DRD071KL, "RES SMD 1K OHM 0.5% 1/8W 0805", Device Package="0805 (2012 Metric)", Manufacturer=Yageo, Operating Temperature="-55°C ~ 155°C", Power (Watts)="0.125W, 1/8W", Supplier Device Package=0805, Supplier Part Number 1=311-2717-1-ND, Temperature Coefficient=±25ppm/°C, Tolerance=±0.5%, ComponentLink1Description=Datasheet, ComponentLink1URL=https://www.yageo.com/upload/media/product/productsearch/datasheet/rchip/PYu-RT_1-to-0.01_RoHS_L_11.pdf, ComponentLink2Description="DigiKey Link", ComponentLink2URL=http://digikey.com/product-detail/en/yageo/RT0805DRD071KL/311-2717-1-ND/6129136, Composition="Thin Film", Height - Seated (Max)="0.024\" (0.60mm)", LastUpdated="1/21/2020 1:41:30 AM", Lifecycle Status=Active, Minimum Order=1, Number of Terminations=2, Package / Case="0805 (2012 Metric)", Packaging=TapeAndReel, Part Number=RT0805DRD071KL, Part Status=Active, PartId=46687, Price=0.03, Resistance="1 kOhms", Series=RT, Size / Dimension="0.079\" L x 0.049\" W (2.00mm x 1.25mm)", Supplier 1=DigiKey
R19: library part ERJ-6ENF1743V, "RES SMD 174K OHM 1% 1/8W 0805", Device Package="0805 (2012 Metric)", Manufacturer="Panasonic Electronic Components", Operating Temperature="-55°C ~ 155°C", Power (Watts)="0.125W, 1/8W", Ratings=AEC-Q200, Supplier Device Package=0805, Supplier Part Number 1=P174KCCT-ND, Temperature Coefficient=±100ppm/°C, Tolerance=±1%, ComponentLink1Description=Datasheet, ComponentLink1URL=https://industrial.panasonic.com/cdbs/www-data/pdf/RDA0000/AOA0000C304.pdf, ComponentLink2Description="DigiKey Link", ComponentLink2URL=http://digikey.com/product-detail/en/panasonic-electronic-components/ERJ-6ENF1743V/P174KCCT-ND/111154, Composition="Thick Film", Features="Automotive AEC-Q200", Height - Seated (Max)="0.028\" (0.70mm)", LastUpdated="1/21/2020 1:41:47 AM", Lifecycle Status=Active, Minimum Order=1, Number of Terminations=2, Package / Case="0805 (2012 Metric)", Packaging=TapeAndReel, Part Number=ERJ-6ENF1743V, Part Status=Active, PartId=46286, Price=0.01, Resistance="174 kOhms", Series=ERJ, Size / Dimension="0.079\" L x 0.049\" W (2.00mm x 1.25mm)", Supplier 1=DigiKey

## Via types
v1: diameter 0.5, hole 0.2, Top Layer to Bottom Layer, tented both sides, 183 vias
v2: diameter 0.6, hole 0.3, Top Layer to Bottom Layer, tented both sides, 4 vias

## Nets (pads, with @x,y where several pads share a name; then routed paths per layer and width w, separated by ;. In a path a pad name is that pad's centre, name@x,y a point inside that pad or via, vN(x,y) a via of type N, cw(c..) or ccw(c..) an arc to the next point about the centre after c; other vN are vias at no path point)
AGND: C8.1 C9.1 IC1.12 NT1.1 NT2.1 R2.1 | length 9.8
  Top Layer w0.2: C9.1@148.675,46.675 C9.1 ; 156.15,52.325 156.2,52.275 ; C8.1@157.575,53.875 158.125,54.425 C8.1 ; 159.225,52.275 160.325,53.375 R2.1
  Top Layer w1: NT1.1 C9.1@148.675,46.675 ; 156.2,52.275 NT2.1 ; C8.1@157.575,53.875 NT2.1 ; 159.225,52.275 NT2.1
  other v1: 148.125,49.425 148.9,49.425 149.775,49.425 150.575,49.425 156.6,53.925 155.85,53.95 155.875,54.775 156.6,54.775
BST: C7.2 D1.2 IC1.10 | length 16.9
  Top Layer w0.2: C7.2 153.3,55.625 154.339,56.664 154.339,56.911 ; IC1.10 154.339,56.911 ; v1(154.825,56.425) 154.339,56.911 ; D1.2 165.3,57.231 165.4,57.131 v1(165.4,57.05)
  Layer 1 w0.2: v1(154.825,56.425) 154.875,56.475 157.3,56.475 159.025,54.75 161.525,54.75 161.675,54.9 163.25,54.9 v1(165.4,57.05)
DH: IC1.7 IC2.G
  other v1: 151.575,55.375 151.65,55.95 150.7,56.425 151.325,56.425 150.7,57.05 151.05,59.025 151.8,59.025
DL: IC1.4 IC3.G
  other v1: 147.125,56.525 147.675,56.525 147.125,57.1 147.675,57.125 152.775,61.175 152.8,61.75 153.075,62.225 153.725,62.25
EN: IC1.15 R3.1 | length 12.1
  Top Layer w0.2: IC1.15 157.119,59.7 157.269,59.85 v1(157.375,59.85) ; R3.1 161.325,64.625 v2(162.65,64.625)
  Bottom Layer w0.2: v1(157.375,59.85) 156.65,60.575 156.65,62.125 158.525,64 162.025,64 v2(162.65,64.625)
FB: C13.1 Cff.1 IC1.13 R1.1 R2.2 | length 27.3
  Top Layer w0.2: C13.1 145.825,60.3 146.968,61.443 147.118,61.443 v1(147.175,61.5) ; IC1.13 156.491,58.362 156.503,58.375 v1(157.425,58.375)
  Top Layer w0.4: v1(160.175,56.275) 162.075,54.375 R2.2 163.2,53.475 Cff.1@164.15,52.525 ; R1.1 Cff.1@164.15,52.525 ; Cff.1 164.15,52.475 Cff.1@164.15,52.525
  Bottom Layer w0.2: v1(147.175,61.5) 147.175,60.175 147.725,59.625 156.175,59.625 v1(157.425,58.375) 159.525,56.275 v1(160.175,56.275)
FREQ: IC1.6 R19.1 R20.2 | length 8.8
  Top Layer w0.2: R19.1 146.25,63.275 147.725,63.275 147.825,63.275 148.175,63.275 148.65,62.8 148.65,62.7 151.65,59.7 IC1.6
ILIM: C14.2 IC1.3 R7.1 | length 5.2
  Top Layer w0.2: R7.1 154.075,63.775 C14.2@154.339,64.039 ; IC1.3 C14.2@154.339,64.039 ; C14.2 C14.2@154.339,64.039
NetC13_2: C13.2 R4.1 | length 2.3
  Top Layer w0.2: C13.2 145.825,58.75 R4.1
PG: IC1.14 R6.1 | length 11.3
  Top Layer w0.2: IC1.14 156.491,59.087 157.387,59.087 v1(157.425,59.125) ; R6.1 163.925,60.6 v2(163.95,60.625)
  Layer 1 w0.2: v1(157.425,59.125) 159.275,59.125 160.775,57.625 161.5,57.625 163.9,60.025 163.9,60.575 v2(163.95,60.625)
PGND: C1.1 C2.1 C3.1 C4.2 C5.2 C6.1 C10.1 C11.2 C14.1 IC1.5 IC1.17 IC3.S J1.2 J2.1 MECH1.MH1 MECH2.MH1 MECH3.MH1 MECH4.MH1 NT1.2 NT2.2 R20.1 TP13.1 | length 11.2
  Top Layer w0.2: 151.625,44.675 151.7,44.6 ; v1(151.95,60.375) v1@151.963,60.362 ; IC1.5@152.863,60.362 IC1.5 ; IC1.17@153.864,60.175 IC1.17 ; C2.1 C2.1@157.575,49.55
  Top Layer w0.5: v1@151.963,60.362 IC1.5@152.863,60.362 ; IC1.5 152.906,60.319 153.72,60.319 IC1.17
  Top Layer w0.6: C3.1 158.85,58.6 159.2,58.25 159.2,58.099 159.4,57.899 159.4,57.275 v1(159.425,57.25)
  Top Layer w0.8: 149.825,42.875 NT1.2 151.625,44.675
  Top Layer w1: C2.1@157.575,49.55 NT2.2
  other v1: 131.4,27 151.2,27 153,27 154.8,27 152.1,28.8 153.9,28.8 131.4,30.6 151.2,30.6 153,30.6 150.3,32.4 152.1,32.4 153.9,32.4 155.7,32.4 157.5,32.4 149.4,34.2 151.2,34.2 153,34.2 154.8,34.2 156.6,34.2 158.4,34.2 146.7,36 152.1,36 153,37.8 154.8,37.8 160.2,37.8 148.5,39.6 150.3,39.6 152.1,39.6 153.9,39.6 155.7,39.6 157.5,39.6 159.3,39.6 151.2,41.4 153,41.4 154.8,41.4 156.6,41.4 158.4,41.4 160.2,41.4 150.3,43.2 152.1,43.2 153.9,43.2 155.7,43.2 157.5,43.2 159.3,43.2 132.3,46.8 134.1,46.8 135.9,46.8 137.7,46.8 139.5,46.8 141.3,46.8 143.1,46.8 168.3,46.8 166.798,47.732 167.423,48.332 131.4,48.6 133.2,48.6 135,48.6 136.8,48.6 138.6,48.6 140.4,48.6 142.2,48.6 168.098,49.007 168.672,49.638 131.4,55.8 133.2,55.8 135,55.8 136.8,55.8 138.6,55.8 140.4,55.8 142.2,55.8 146,55.875 145.175,55.9 163.45,56.35 146.025,56.5 145.2,56.525 132.3,57.6 134.1,57.6 135.9,57.6 137.7,57.6 139.5,57.6 141.3,57.6 164.7,57.6 166.5,57.6 168.3,57.6 131.4,59.4 133.2,59.4 135,59.4 136.8,59.4 138.6,59.4 140.4,59.4 142.2,59.4 165.6,59.4 167.4,59.4 135.9,61.2 137.7,61.2 139.5,61.2 141.3,61.2 164.7,61.2 136.8,63 138.6,63 140.4,63 142.2,63 137.7,64.8 139.5,64.8 141.3,64.8 143.1,64.8 144.9,64.8 146.7,64.8 155.7,64.8 156.475,66.25 148.05,66.35
PVDD: C6.2 C8.2 D1.1 IC1.1 IC1.2 | length 15.7
  Top Layer w0.2: IC1.2 IC1.1 155.639,61.416 156.775,62.552 156.775,62.575 157.325,63.125 C6.2@157.375,63.125 ; v1(157.6,57.4) 157.6,56.575 158.15,56.025 C8.2 159.2,56.025 160.45,57.275 160.45,57.85 161,58.4 161.081,58.4 161.181,58.5 D1.1
  Layer 2 w0.2: v1(155.7,62) 156.6,61.1 156.6,58.4 v1(157.6,57.4)
SW: C7.1 IC1.8 IC2.D IC3.D L1.1 R4.2 R7.2 | length 8.7
  Top Layer w0.2: v2(149.75,60.175) 149.75,58.8 R4.2 150.15,58.4 IC1.8 ; R7.2 150.65,63.7 v2(150.65,62.325)
  Bottom Layer w0.2: v2(149.75,60.175) 150.176,60.601 150.301,60.601 150.65,60.95 v2(150.65,62.325)
  other v1: 151.4,52.825 151.625,53.4 151.9,53.95 151.6,54.525 152.9,56.975 152.575,57.425 152.875,57.925
VIN: C1.2 C2.2 C3.2 C4.1 C5.1 IC1.16 IC2.S J1.1 R3.2 R6.2 R19.2 | length 7
  Top Layer w0.2: IC1.16 158.65,60.35 C3.2 158.8,62.25 159,62.45 159,64.05 R3.2
  other v1: 161.35,50.875 159,50.9 159.75,50.9 160.55,50.9 162.2,50.9 150.025,56.125 148.85,56.15 149.425,56.15 150.025,56.65 148.825,56.675 149.425,56.8 148.825,57.2 150.025,57.2 144.025,61.35 160.775,61.9 159.925,61.925 159,61.95 160.775,62.85 159.95,62.875 159.05,62.9
VOUT: C9.2 C10.2 C11.1 Cff.2 J2.2 L1.2 R1.2
  other v1: 146.225,44.444 145.65,44.919 146.8,44.919 146.75,49.294 145.575,49.325 145.6,50.075 146.75,50.069 166.5,50.9 167.3,50.894 168.075,50.894 165.725,50.919
pads on no net: IC1.9 IC1.11

## Polygon pours and split planes (outlines as drawn)
PGND on Top Layer "PGND_L01_P032" (solid, remove dead copper, pour order 32): 130.775,67.075 130.7,67 130.7,55 170.3,55 170.325,54.975 170.325,67.075
DH on Top Layer "DH_L01_P013" (solid, remove dead copper, pour order 13): 150.425,55.05 150.425,57.525 151.4,57.525 152.15,56.775 152.125,56.75 152.125,55.025
PGND on Top Layer "PGND_L01_P000" (solid, pour order 0): 156.525,25.75 149.4,25.75 149.275,25.875 149.275,32.975 146.375,35.875 146.375,39.5 146.4,39.5 147.775,40.875 147.675,40.975 147.675,43.8 149.175,43.8 149.275,43.9 149.275,45.3 150.35,45.3 151.3,46.25 151.3,50.475 156.775,50.475 156.825,50.425 156.825,50.925 158.3,50.925 158.3,47.8 158.525,47.8 160.525,45.8 160.525,34.475 156.525,30.475
SW on Top Layer "SW_L01_P036" (solid, remove dead copper, pour order 36): 131.525,54.225 143.075,54.225 143.075,57.45 131.525,57.45
no net on Top Layer "NONET_L01_P035" (solid, pour order 35): 131.525,54.917 131.567,54.875 144.225,54.875
SW on Top Layer "SW_L01_P005" (solid, remove dead copper, pour order 5): 131.525,54.917 131.525,49.5 143.925,49.5 145,50.575 155.4,50.575 155.4,54.8 155.425,54.825
SW on Top Layer "SW_L01_P029" (solid, remove dead copper, pour order 29): 149.875,64.525 151.225,64.525 151.225,61.825 151.2,61.85 149.9,61.85
SW on Top Layer "SW_L01_P026" (solid, remove dead copper, pour order 26): 153.225,58.675 153.25,58.65 153.25,56.675 152.65,56.675 151.525,57.8 149.1,57.8 149.1,60.675 149.15,60.725 149.975,60.725 150.525,60.175 150.525,58.7
PGND on Top Layer "PGND_L01_P024" (solid, remove dead copper, pour order 24): 163.375,50.3 163.225,50.15 163.225,48.35 165.4,48.35 167.2,46.55 169.45,48.8 169.45,50.35 169.4,50.4 163.3,50.4
VIN on Top Layer "VIN_L01_P021" (solid, remove dead copper, pour order 21): 143.325,63.525 143.325,60.9 143.375,60.85 144.7,60.85 144.7,63.525 144.675,63.55
VIN on Top Layer "VIN_L01_P019" (solid, remove dead copper, pour order 19): 148.2,55.025 148.2,57.8 150.425,57.8 150.425,55.06 150.435,55.05 150.41,55.025
DL on Top Layer "DL_L01_P017" (solid, remove dead copper, pour order 17): 154,60.775 154,62.575 152.425,62.575 152.425,60.775
DL on Top Layer "DL_L01_P016" (solid, remove dead copper, pour order 16): 146.85,54.975 146.825,55 146.825,57.625 148.125,57.625 148.125,55.3 148.125,55
DH on Top Layer "DH_L01_P014" (solid, remove dead copper, pour order 14): 153.225,58.675 150.775,58.675 150.75,58.7 150.75,59.425 153.2,59.425 153.225,59.45
VOUT on Top Layer "VOUT_L01_P010" (solid, remove dead copper, pour order 10): 165.15,56.125 168.675,56.125 168.775,56.025 168.775,50.425 165.25,50.425 165.15,50.325
PVDD on Top Layer "PVDD_L01_P008" (solid, remove dead copper, pour order 8): 154.85,60.775 155.775,60.775 155.775,61.25 158.4,61.25 158.4,63.325 156.15,63.325 156.15,63 154.85,61.7
VIN on Top Layer "VIN_L01_P007" (solid, remove dead copper, pour order 7): 159.975,61.4 163.475,61.4 163.425,61.45 163.425,63.5 159.975,63.5
VIN on Top Layer "VIN_L01_P006" (solid, remove dead copper, pour order 6): 156.05,60.2 156.025,60.225 156.025,61.225 157.65,61.225 158.6,62.175 158.6,65.35 160.25,65.35 160.15,65.25 160.15,60.225
AGND on Top Layer "AGND_L01_P002" (solid, pour order 2): 155.375,58 155.425,57.95 155.425,51.7 155.575,51.55 161.2,51.55 161.2,54.725 159.725,54.725 159.25,55.2 157.125,55.2 157.125,57.975
AGND on Top Layer "AGND_L01_P001" (solid, pour order 1): 151.3,50.475 151.3,46.25 150.35,45.3 150.196,45.3 150.196,45.222 150.049,45.075 147.675,45.075 147.675,50.475
VOUT on Top Layer "VOUT_L01_P004" (solid, remove dead copper, pour order 4): 149.337,25.812 136.663,25.812 136.625,25.85 136.65,25.875 136.65,32.175 131.2,32.175 131.175,32.2 131.4,32.425 131.4,45.45 144.825,45.45 144.925,45.55 144.925,50.5 147.65,50.5 147.775,50.375 147.775,40.875 147.75,40.875 146.375,39.5 146.375,35.875 149.275,32.975 149.275,25.875
VIN on Top Layer "VIN_L01_P003" (solid, remove dead copper, pour order 3): 156.525,25.75 164.125,25.75 164.125,32.15 164.225,32.25 169.9,32.25 169.9,43.85 165.4,48.35 163.225,48.35 163.225,50.8 162.475,51.55 158.387,51.55 158.387,47.887 160.1,45.525 160.1,45.075 160.1,34.05 156.525,30.475
PGND on Layer 2 "PGND_L03_P034" (solid, remove dead copper, pour order 34): 130.775,67.075 130.775,25.4 170.325,25.4 170.325,67.075
VIN on Layer 2 "VIN_L03_P009" (solid, remove dead copper, pour order 9): 158.35,50.65 158.4,50.6 158.4,49.85 163.175,49.85 163.4,50.075 163.4,63.525 158.575,63.525 158.55,63.55
DH on Layer 2 "DH_L03_P015" (solid, remove dead copper, pour order 15): 150.45,55.1 150.425,55.125 150.425,59.425 150.45,59.45 152.175,59.45 152.175,56.525 152.175,55.125 152.125,55.075
DL on Layer 2 "DL_L03_P018" (solid, remove dead copper, pour order 18): 154,62.575 154,60.8 154.025,60.775 150.7,60.775 148.4,58.475 148.4,55 146.85,55 146.825,55.025 146.85,55.05 146.85,60.425 148.971,62.546
VIN on Layer 2 "VIN_L03_P022" (solid, remove dead copper, pour order 22): 142.809,61.775 143.375,61.775 144.7,61.775 144.7,54.875 144.75,54.825 144.862,54.937 150.45,54.937 150.45,48.625 142.809,48.625
VIN on Layer 2 "VIN_L03_P020" (solid, remove dead copper, pour order 20): 148.397,57.65 150.45,57.65 150.45,53.175 151.275,52.35 163.375,52.35 163.375,50.1 163.4,50.075 161.9,48.575 159.675,48.575 148.43,48.575
no net on Layer 2 "NONET_L03_P012" (solid, pour order 12): 153.25,58.75
PGND on Bottom Layer "PGND_L04_P041" (solid, remove dead copper, pour order 41): 130.825,67.025 170.35,67.025 170.325,67 170.325,25.4 130.775,25.4
VIN on Bottom Layer "VIN_L04_P040" (solid, remove dead copper, pour order 40): 148.275,52.2 148.225,52.15 148.225,49.15 156.25,49.15 157.95,50.85 158.05,50.75 158.7,50.75 163.425,55.475 163.425,63.4 158.8,63.4 158.725,63.475 158.55,63.3 158.55,54.45 157.925,54.45 155.525,52.05 155.5,52.075 150.175,52.075
VIN on Bottom Layer "VIN_L04_P039" (solid, remove dead copper, pour order 39): 148.35,58.875 150.625,58.875 150.625,55.3 151.087,54.837 151.087,51.812 149.8,50.525 149.575,50.75 145.15,50.75 145.15,54.775 145.1,54.825 145.15,54.875 148.575,54.875 148.575,57.625 148.55,57.65
no net on Bottom Layer "NONET_L04_P038" (solid, pour order 38): 148.6,58.85
no net on Bottom Layer "NONET_L04_P037" (solid, pour order 37): 148.55,57.65
SW on Bottom Layer "SW_L04_P027" (solid, remove dead copper, pour order 27): 152.2,54.825 152.2,52.925 151.1,51.825 151.075,51.825 151.075,57.875 151.7,58.5 151.75,58.45 153.3,58.45 153.3,56.65 153.275,56.625
SW on Bottom Layer "SW_L04_P028" (solid, remove dead copper, pour order 28): 149.1,59.8 149.1,62.275 149.925,63.1 151.225,63.1 151.225,60.525 150.5,59.8
VOUT on Bottom Layer "VOUT_L04_P011" (solid, remove dead copper, pour order 11): 144.95,49 144.95,44.05 162.375,44.05 168.775,50.45 168.775,56.25 165.3,56.25 163.1,54.05 156.618,49
PGND on Layer 1 "PGND_L02_P025" (solid, remove dead copper, pour order 25): 130.775,67.075 170.325,67.075 170.325,25.4 130.775,25.4 130.775,67.075
AGND on Layer 1 "AGND_L02_P023" (solid, remove dead copper, pour order 23): 157.125,55.2 157.175,55.15 157.175,53.35 155.625,53.35 151.275,49 147.65,49 147.625,48.975 147.6,49 147.6,50.525 149.8,50.525 154.5,55.225

## Keep-outs
Keep-Out Layer:
  the board outline again, w0.254

## Silkscreen, mask and mechanical layers (free items; w line width, h text height)
Mechanical 7:
  lines w0.254: 127.875,25.4 145.875,25.4 ; 133.375,20.325 151.375,20.325 ; 159.875,25.4 177.875,25.4

## Text inside footprints (layer, text, board x,y; h text height)
IC1: Top Overlay "*" at 154.725,62.35 h0.8 r270; Mechanical 13 "*" at 155.329,61.077 h0.8 r270